# Altium PCB Senior_DoorLock.PcbDoc
Units mil, origin at the board's own origin, x right, y up, seen from the top; angles counter-clockwise.
Board outline 2320 x 1850 mil, 2 copper layers (Top Layer, Bottom Layer); 11 components, 10 nets, 30 pads, 1 vias.
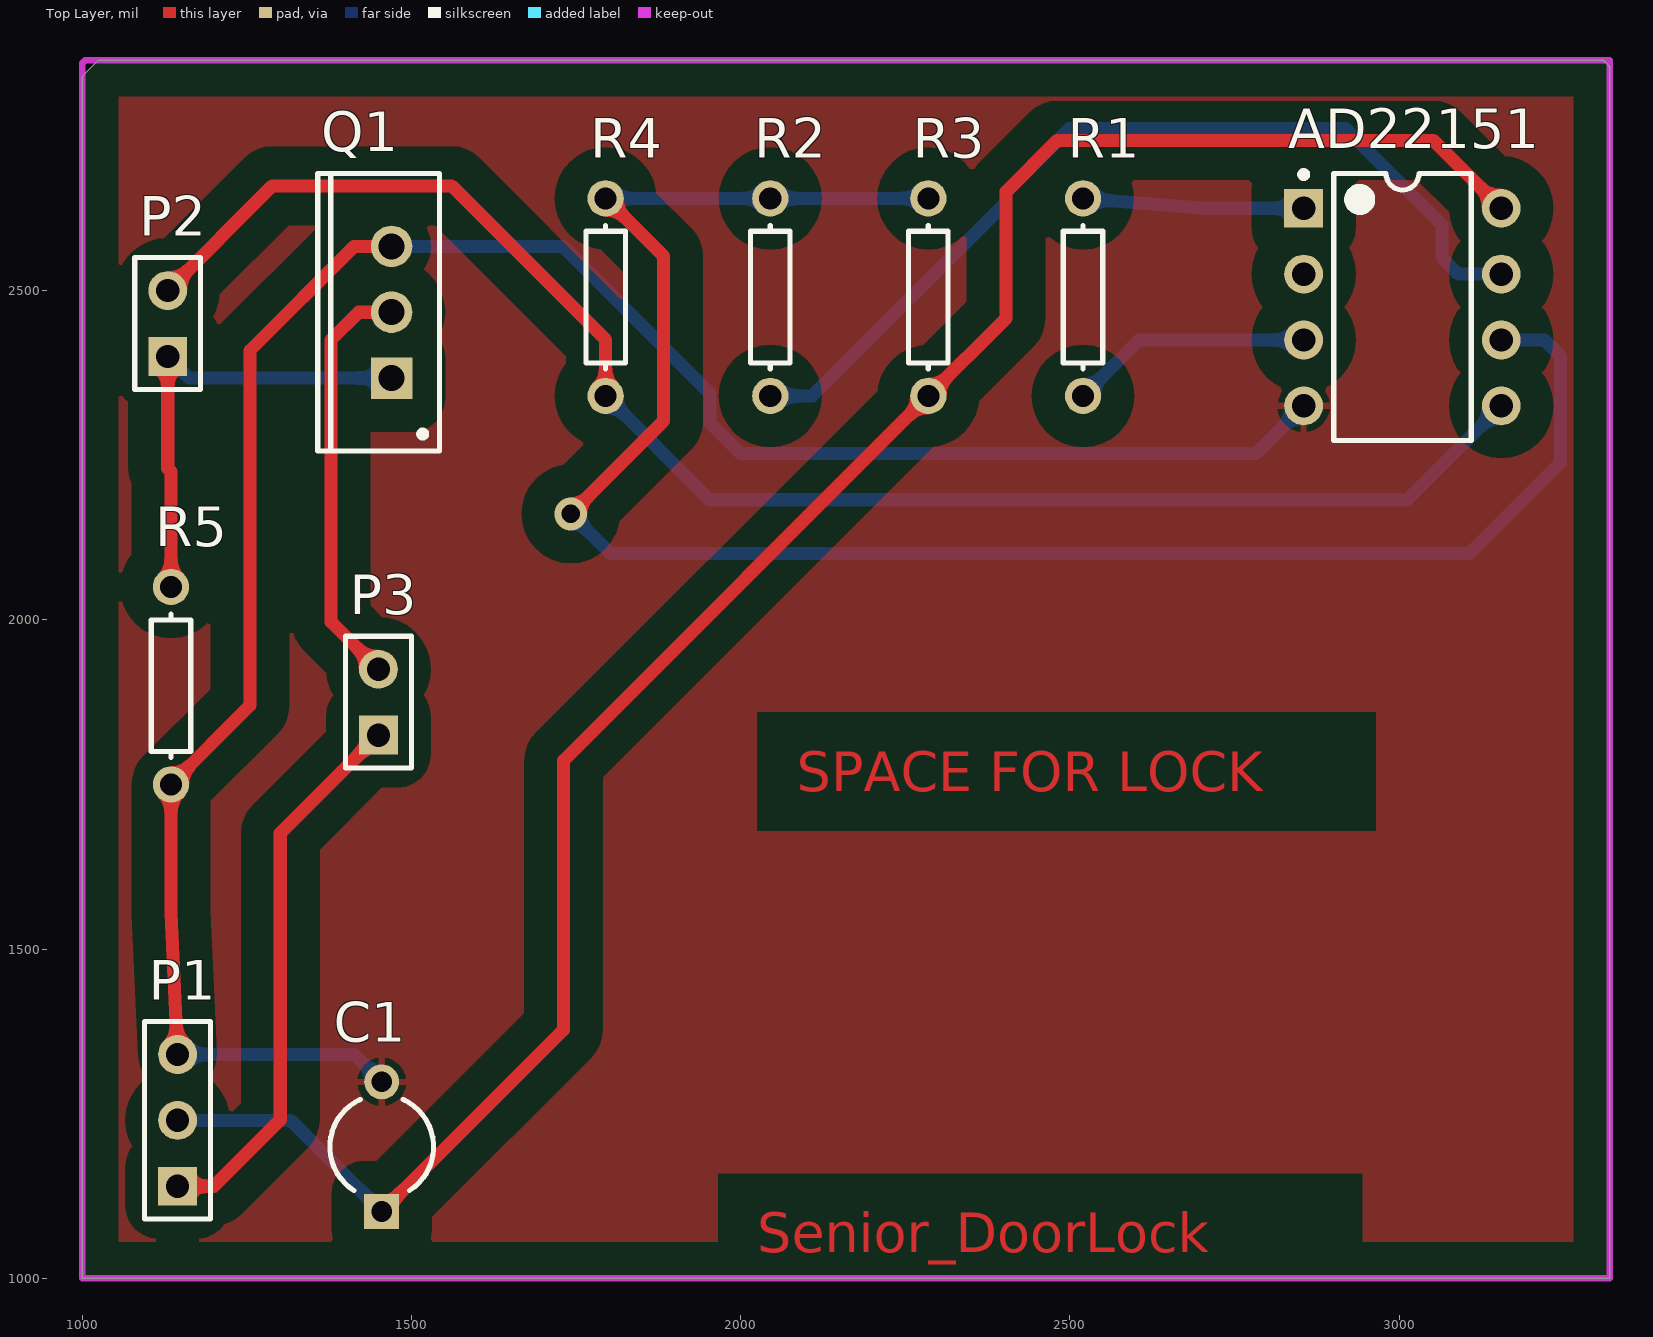
[diagram p0: Top Layer view]
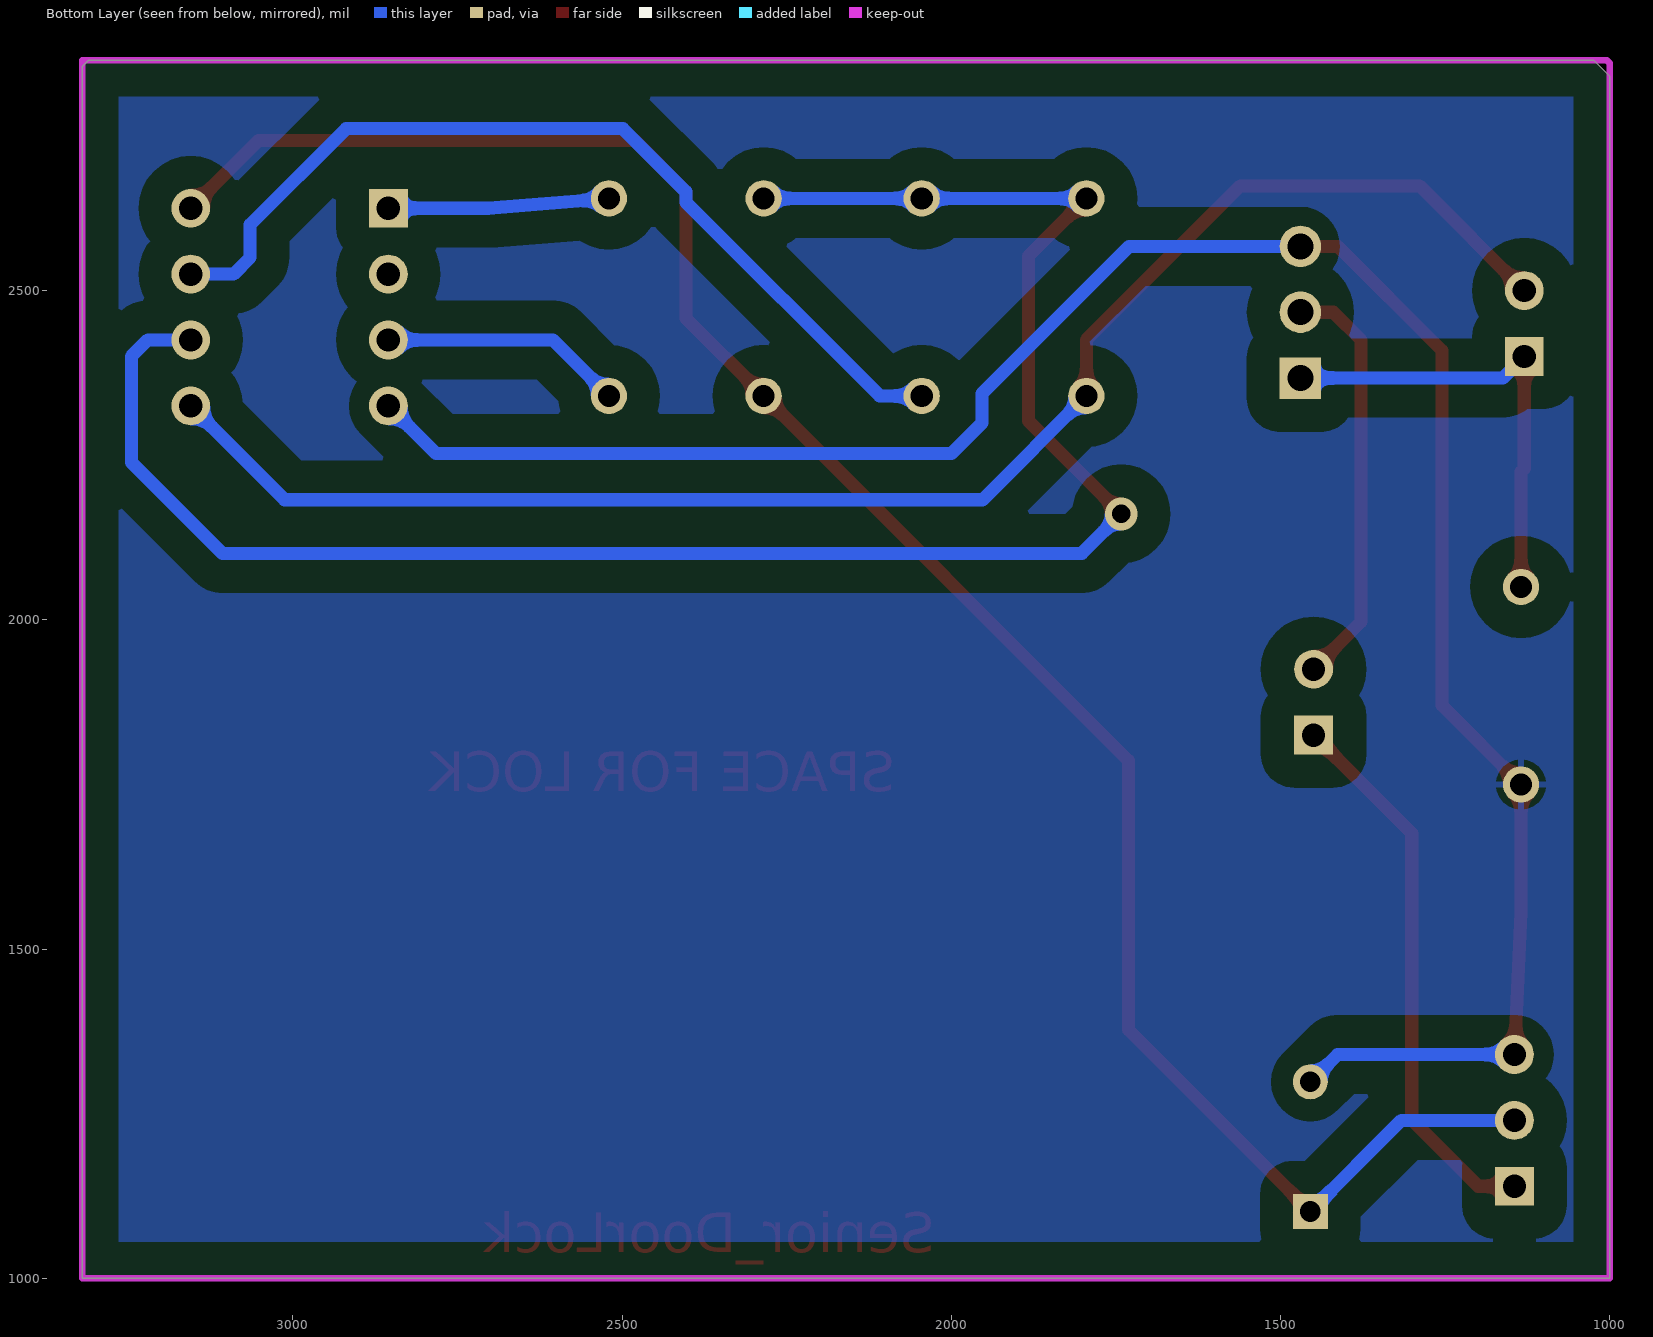
[diagram p1: Bottom Layer view, seen from below]

## Layer stack, top to bottom
Top Solder: solder mask 0.4, Solder Resist, Dk 3.5
Top Layer: signal copper 1.4
Dielectric 1: dielectric 12.6, FR-4, Dk 4.8
Bottom Layer: signal copper 1.4
Bottom Solder: solder mask 0.4, Solder Resist, Dk 3.5

## Board outline
1000,1000 1000,2825 1025,2850 3310,2850 3320,2840 3320,1000

## Design rules (kind name [scope] priority, off if disabled: settings)
Clearance [All] p1: gap=50 ignorepadtopadclearanceinfootprint=FALSE
PolygonConnect [All] p1: connectstyle=Relief reliefconductorwidth=10 reliefentries=4 polygonreliefangle="90 Angle" airgapwidth=10
RoutingVias [All] p1: holewidth=28 width=50 viastyle="Through Hole" minholewidth=28 minwidth=50 maxholewidth=28 maxwidth=50
SolderMaskExpansion [All] p1: expansion=4
Width [All] p1: maxlimit=20 minlimit=20 preferedwidth=20
30 further rules are at their usual default settings.

## Components (designator, comment, footprint, x,y, rotation, side; value= is the part's Value field where it differs from the comment)
AD22151 "AD22151 Breakout" DIP-8 3005,2475 r0 top
C1 "Cap2" CAPR5-4X5 1455,1200 r90 top value=100pF
P1 "Power" HDR1X3 1145,1140 r90 top
P2 "DSP_Signals" HDR1X2 1130,2400 r90 top
P3 "DoorLock" HDR1X2 1450,1825 r90 top
Q1 "NMOS-2" TO-220AB 1470,2467.17 r90 top
R1 "Res1" AXIAL-0.3 2520,2490 r90 top value=330K
R2 "Res1" AXIAL-0.3 2045,2490 r270 top value=1K
R3 "Res1" AXIAL-0.3 2285,2490 r270 top value=700K
R4 "Res1" AXIAL-0.3 1795,2490 r90 top value=100K
R5 "Res1" AXIAL-0.3 1135,1900 r90 top value=100

## Footprints (in the part's own frame and the unit in brackets; to place one, negate y for a bottom-side part, rotate by r counter-clockwise, add the part's x,y. Pads: shape width x height; smd on the part's side, far side on the other; paste and mask are expansions set on the pad)
AXIAL-0.3 [mm] "Axial Device, Thru-Hole; 2 Leads; 0.3 in Pin Spacing"
  round 1.4 hole 0.85: 1(-3.81,0) 2(3.81,0)
  silkscreen extent -2.77,-0.76 2.77,0.76
CAPR5-4X5 [mm] "Capacitor; 2 Leads"
  rect 1.35x1.35 hole 0.8: 1(-2.5,0)
  round 1.35 hole 0.8: 2(2.5,0)
  silkscreen extent -1.69,-2 1.82,2
DIP-8 [mm] "DIP; 8 Leads; Row Spacing 7.62 mm; Pitch 2.54 mm"
  rect 1.5x1.5 hole 0.9: 1(-3.81,3.81)
  round 1.5 hole 0.9: 2(-3.81,1.27) 3(-3.81,-1.27) 4(-3.81,-3.81) 5(3.81,-3.81) 6(3.81,-1.27) 7(3.81,1.27) 8(3.81,3.81)
  silkscreen extent -3.93,-5.15 2.65,5.23, body extent -3.6,-5.15 3.6,5.15, height 5.08
HDR1X2 [mm] "Connector; Header; 2 Position"
  rect 1.5x1.5 hole 0.9: 1(0,0)
  round 1.5 hole 0.9: 2(2.54,0)
  silkscreen extent -1.27,-1.27 3.81,1.27
HDR1X3 [mm] "Connector; Header; 3 Position"
  rect 1.5x1.5 hole 0.9: 1(0,0)
  round 1.5 hole 0.9: 2(2.54,0) 3(5.08,0)
  silkscreen extent -1.27,-1.27 6.35,1.27
TO-220AB [mm] "TO, Thru-Hole, Vertical, Heatsink Mounted; 3 In-Line Leads; Pitch 2.54 mm"
  rect 1.6x1.6 hole 1: 1(-2.54,0)
  round 1.6 hole 1: 2(0,0) 3(2.54,0)
  silkscreen extent -5.35,-1.85 5.35,2.85, body extent -5.4,-1.9 5.4,2.9, height 19.3

## Part data
AD22151: "Magnetic Field Sensor"
C1: "Capacitor", PackageDescription="Capacitor; 2 Leads", PackageReference=CAPR5-4X5, Published=23-Sep-2002, Publisher="Altium Limited"
P1: library part "Header 3", "Header, 3-Pin", LatestRevisionDate=17-Jul-2002, LatestRevisionNote="Re-released for DXP Platform.", Publisher="Altium Limited"
P2 P3: library part "Header 2", "Header, 2-Pin", LatestRevisionDate=17-Jul-2002, LatestRevisionNote="Re-released for DXP Platform.", Publisher="Altium Limited"
Q1: "N-Channel Power MOSFET", ComponentLink1Description="Manufacturer Link", ComponentLink1URL=http://www.irf.com/, DatasheetVersion=PD-9.814, LatestRevisionDate=17-Jul-2002, LatestRevisionNote="Re-released for DXP Platform.", Note="Pin 2 is electrically connected to pin 4.", PackageDescription="TO, Thru-Hole, Vertical, Heatsink Mounted; 3 In-Line Leads; Pitch 2.54 mm", PackageReference=TO-220AB, PackageVersion=Feb-1997, Published=8-Jun-2000, Publisher="Altium Limited"
R1 R2 R3 R4 R5: "Resistor", LatestRevisionDate=17-Jul-2002, LatestRevisionNote="Re-released for DXP Platform.", PackageDescription="Axial Device, Thru-Hole; 2 Leads; 0.3 in Pin Spacing", PackageReference=AXIAL-0.3, Published=8-Jun-2000, Publisher="Altium Limited"

## Via types
v1: diameter 50, hole 28, Top Layer to Bottom Layer, 1 vias

## Nets (pads, with @x,y where several pads share a name; then routed paths per layer and width w, separated by ;. In a path a pad name is that pad's centre, name@x,y a point inside that pad or via, vN(x,y) a via of type N, cw(c..) or ccw(c..) an arc to the next point about the centre after c; other vN are vias at no path point)
5.0V: AD22151.8 C1.1 P1.2 R3.2 | length 3135.4
  Top Layer w20: C1.1 1731,1377.57 1731,1786 R3.2 2403,2458 2403,2650 2481,2728 3052,2728 AD22151.8
  Bottom Layer w20: P1.2 1316.57,1240 C1.1
12.0V: P1.1 P3.1 | length 843.6
  Top Layer w20: P1.1 1200,1140 1301,1241 1301,1676 P3.1
GND: AD22151.4 C1.2 P1.3 Q1.3 R5.1 | length 3298.2
  Top Layer w20: P1.3 1135,1555 R5.1 1255,1870 1255,2409 1413.17,2567.17 Q1.3
  Bottom Layer w20: P1.3 1413.43,1340 C1.2 ; Q1.3 1729.83,2567.17 1953.56,2343.44 1953.56,2298.88 2000,2252.44 2782.44,2252.44 AD22151.4
Lock_Enable: P2.1 Q1.1 R5.2 | length 705.7
  Top Layer w20: P2.1 1130,2230 1135,2225 R5.2
  Bottom Layer w20: P2.1 1162.83,2367.17 Q1.1
MagSense: AD22151.5 P2.2 R4.1 | length 2397.1
  Top Layer w20: P2.2 1289,2659 1561,2659 1795,2425 R4.1
  Bottom Layer w20: R4.1 1952.56,2182.44 3012.44,2182.44 AD22151.5
NetAD22151_1: AD22151.1 R1.2 | length 335.6
  Bottom Layer w20: R1.2 2703,2625 AD22151.1
NetAD22151_3: AD22151.3 R1.1 | length 370.2
  Bottom Layer w20: R1.1 2605,2425 AD22151.3
NetAD22151_6: AD22151.6 R2.1 R3.1 R4.2 | length 2910.2
  Top Layer w20: v1(1742,2161) 1883,2302 1883,2552 R4.2
  Bottom Layer w20: v1(1742,2161) 1802,2101 3107,2101 3245,2239 3245,2400 3220,2425 AD22151.6 ; R4.2 R2.1 R3.1
NetAD22151_7: AD22151.7 R2.2 | length 1408.4
  Bottom Layer w20: R2.2 2109,2340 2403,2634 2403,2650 2499,2746 2919,2746 3065,2600 3065,2550 3090,2525 AD22151.7
NetP3_2: P3.2 Q1.2 | length 639.3
  Top Layer w20: P3.2 1378,1997 1378,2425 1420.17,2467.17 Q1.2
pads on no net: AD22151.2

## Polygon pours and split planes (outlines as drawn)
GND on Top Layer "Top Layer-No Net" (solid, pour order 0): 1025,2850 3310,2850 3310,1010 3320,1000 1000,1000 1000,2825
GND on Bottom Layer "Top Layer-No Net" (solid, pour order 2): 995,990 995,995 1000,1000 1000,2825 1025,2850 3310,2850 3310,1010 3320,1000 1000,1000

## Keep-outs
Keep-Out Layer:
  lines w10: 1000,1000 3320,1000 3320,2850 1005,2850 1000,2845 1000,1000

## Other copper
Top Layer:
  text "SPACE FOR LOCK" at 2085,1740 h60
  text "Senior_DoorLock" at 2025,1040 h60